# Altium PCB ADC_01_HYB.PcbDoc
Units mm, origin at the board's own origin, x right, y up, seen from the top; angles counter-clockwise.
Board outline 100 x 100 mm, 2 copper layers (Top Layer, Bottom Layer); 74 components, 104 nets, 316 pads, 45 vias.
Unrouted connection lines stored in the file: 1.
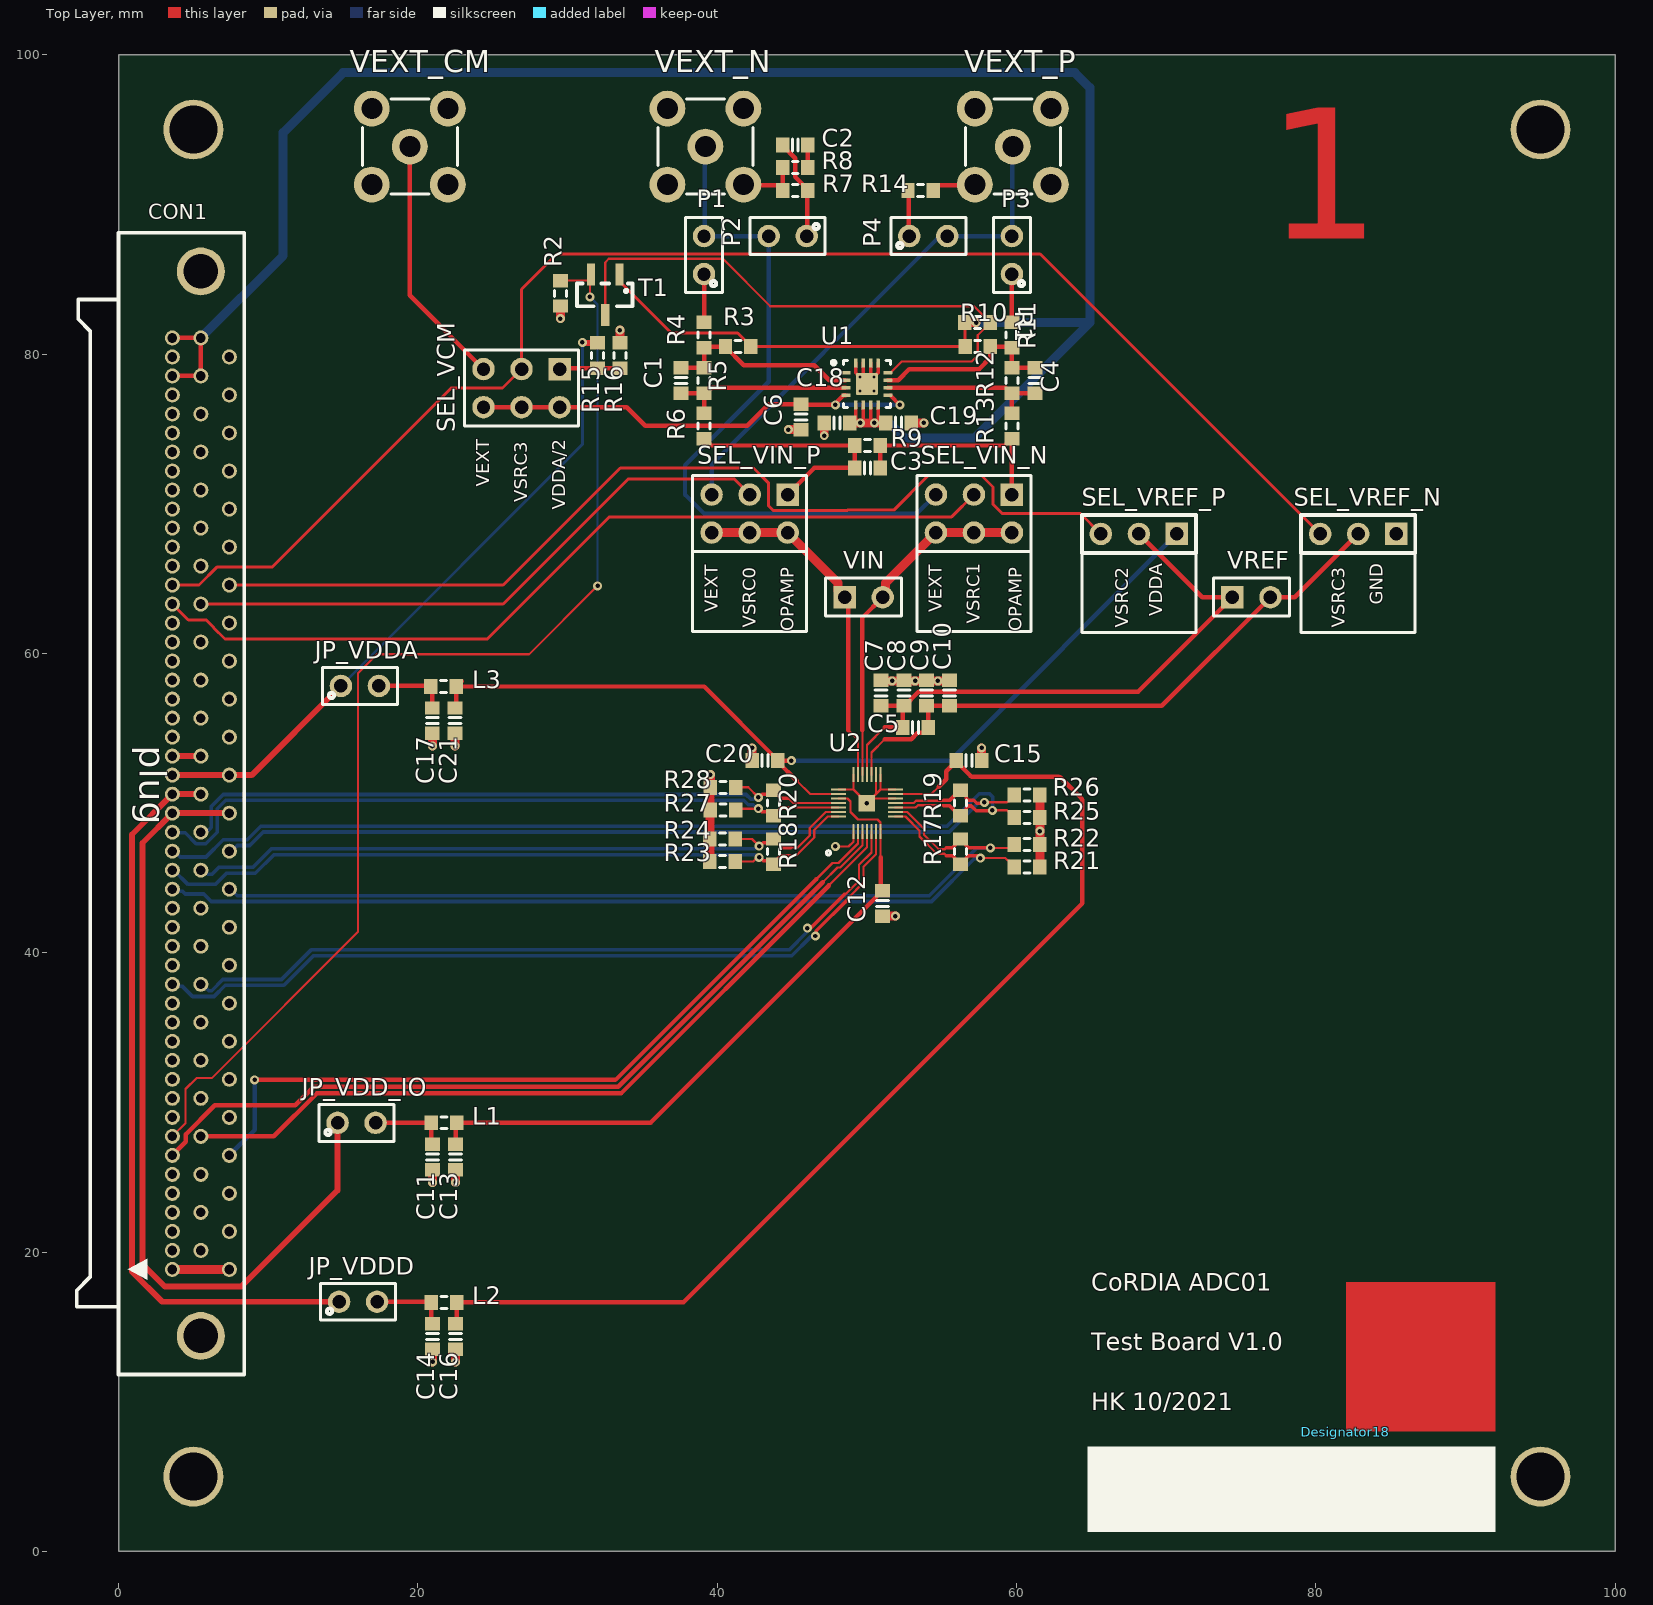
[diagram p0: Top Layer view]
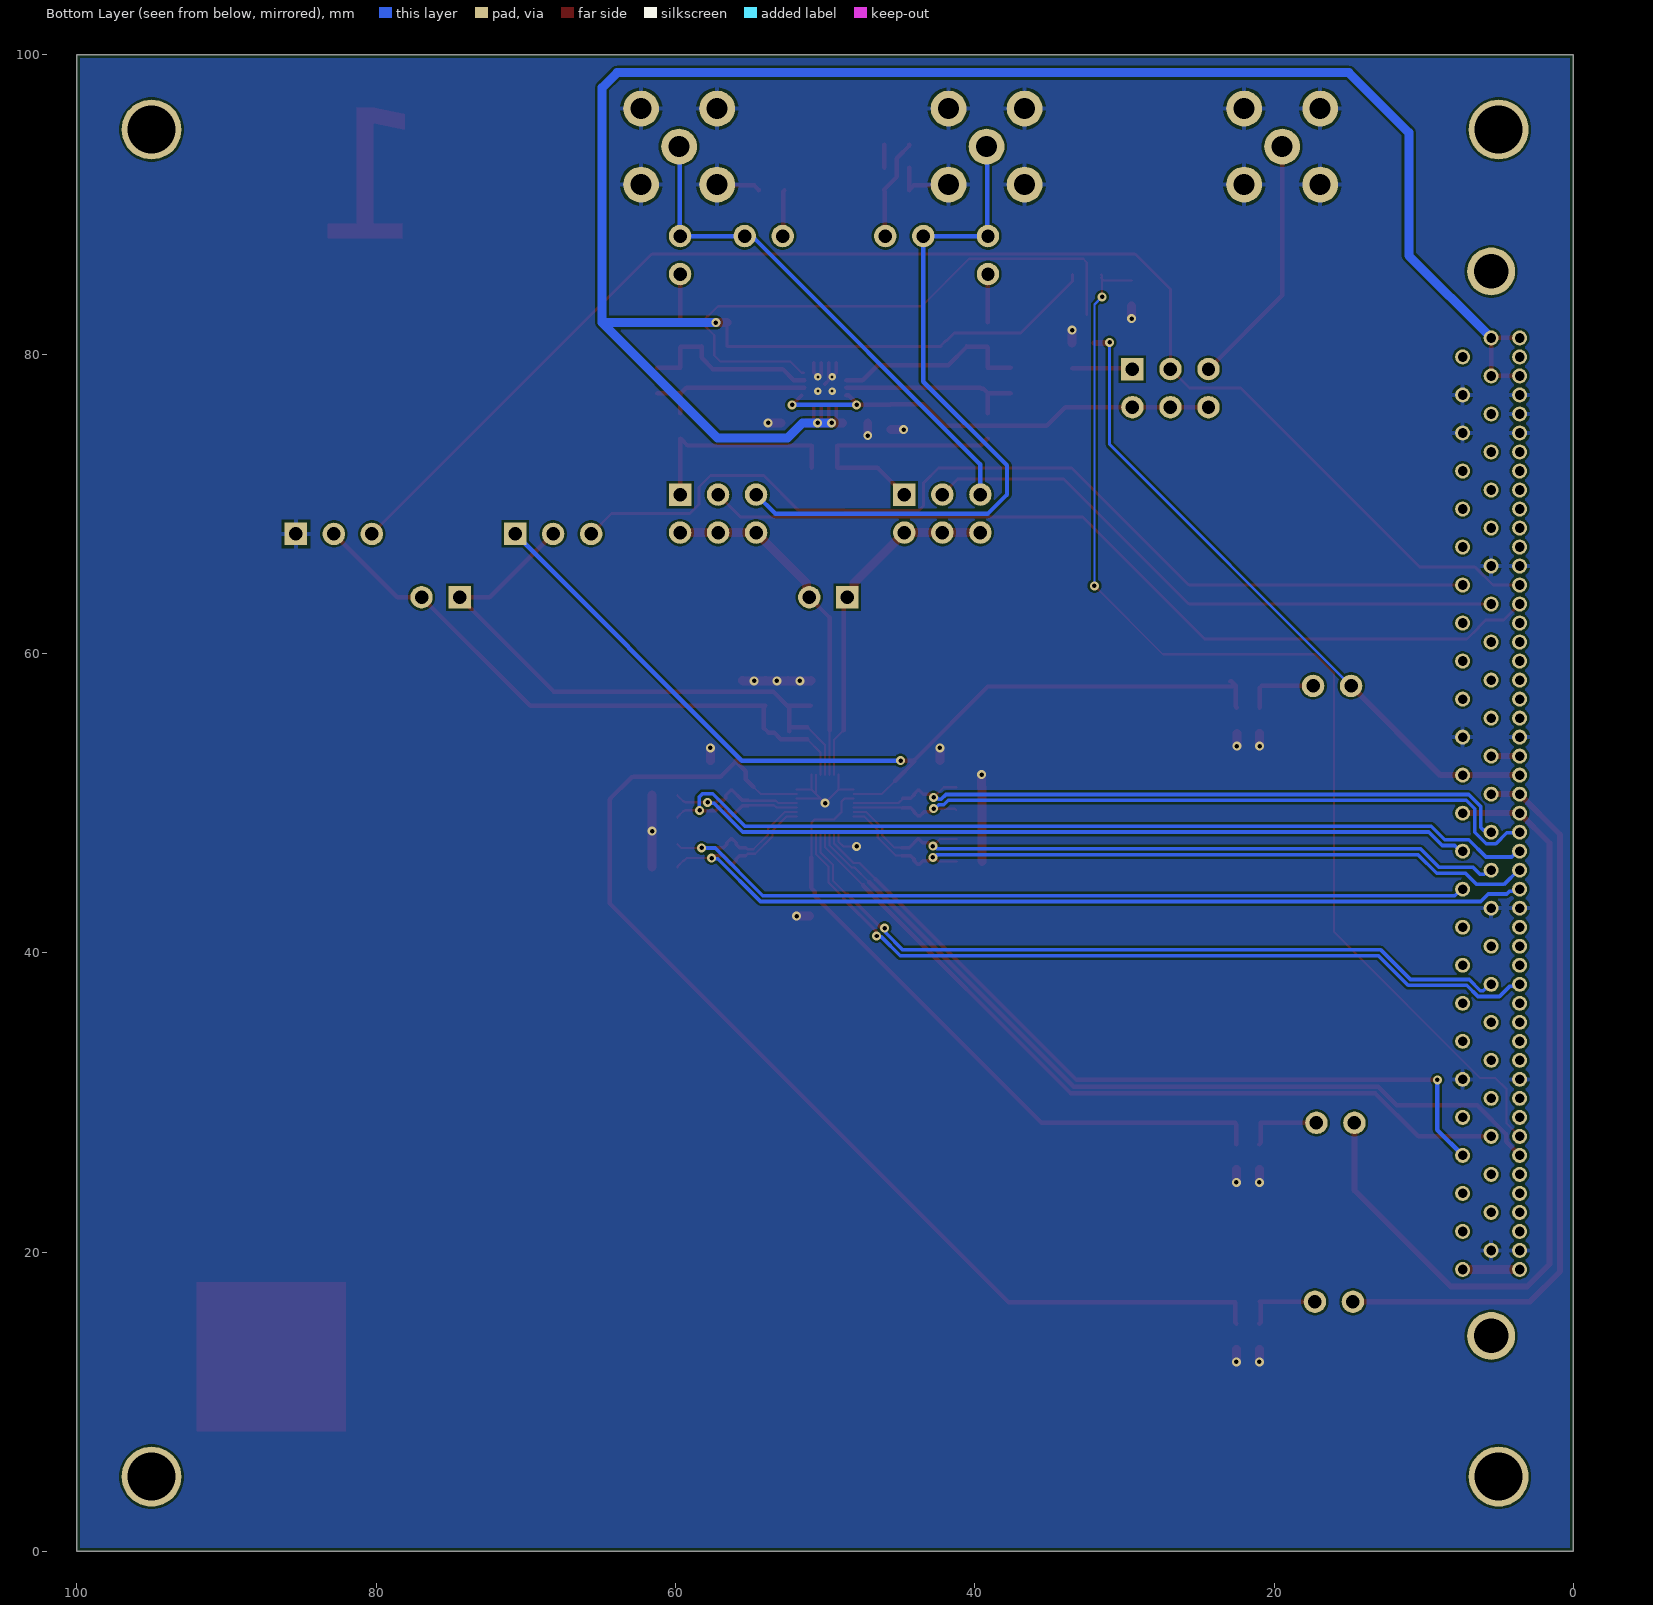
[diagram p1: Bottom Layer view, seen from below]

## Layer stack, top to bottom
Top Solder: solder mask 0.0102, Solder Resist, Dk 3.5
Top Layer: signal copper 0.0356
Dielectric1: dielectric 0.32, FR-4, Dk 4.8
Bottom Layer: signal copper 0.0356
Bottom Solder: solder mask 0.0102, Solder Resist, Dk 3.5

## Board outline
0,0 0,100 100,100 100,0

## Design rules (kind name [scope] priority, off if disabled: settings)
Clearance [All] p1: gap=0.15 ignorepadtopadclearanceinfootprint=FALSE except(0: Arc-Hole Track-Hole SMDPad-Hole THPad-Hole Via-Hole Fill-Hole Poly-Hole Region-Hole Text-Hole)
ComponentClearance [All] p1: gap=0.05 collisioncheckmode=3 verticalgap=0.254 showdistances=FALSE
DiffPairsRouting [All] p1: maxlimit=0.15 minlimit=0.15 mostfreqgap=0.15 toplayer_minwidth=0.15 toplayer_maxwidth=0.24 toplayer_prefwidth=0.24 bottomlayer_minwidth=0.15 bottomlayer_maxwidth=0.24 bottomlayer_prefwidth=0.24 maxuncoupledlength=12.7
HoleSize [All] p1: absolutevalues=TRUE maxlimit=4 minlimit=0.025 maxpercent=80.000 minpercent=20.000
MinimumSolderMaskSliver [All] p1 off: minsoldermaskwidth=0.254
PlaneClearance [All] p1: clearance=0.15
PlaneConnect [All] p1: planeconnectstyle=Direct reliefexpansion=0.508 reliefentries=4 reliefconductorwidth=0.254 reliefairgap=0.254
PolygonConnect PolygonConnect_Via [IsVia] p1: connectstyle=Direct reliefconductorwidth=0.254 reliefentries=4 polygonreliefangle="90 Angle" airgapwidth=0.254
PolygonConnect [All] p2: connectstyle=Relief reliefconductorwidth=0.3 reliefentries=4 polygonreliefangle="90 Angle" airgapwidth=0.2
RoutingVias [All] p1: holewidth=0.711 width=1.27 viastyle="Through Hole" minholewidth=0.3 minwidth=0.6 maxholewidth=0.711 maxwidth=1.27
SilkToBoardRegionClearance [All] p1 off:
SilkToSilkClearance [All] p1 off: silktosilkclearance=0.254
SilkToSolderMaskClearance SilkscreenOverComponentPads [IsPad] p1 off: minsilkscreentomaskgap=0.254 clearancetoexposedcopper=TRUE
SolderMaskExpansion [All] p1: expansion=0.102 istentingtop=FALSE
Width [All] p1: maxlimit=5 minlimit=0.15 preferedwidth=0.2
21 further rules are at their usual default settings.

## Classes and differential pairs
net class LVDS_OUT_P[3..0]: LVDS_OUT_P0 LVDS_OUT_P1 LVDS_OUT_P2 LVDS_OUT_P3
net class LVDS_OUT_N[3..0]: LVDS_OUT_N0 LVDS_OUT_N1 LVDS_OUT_N2 LVDS_OUT_N3
net class LVDS_IN_P[3..0]: LVDS_IN_P0 LVDS_IN_P1 LVDS_IN_P2 LVDS_IN_P3
net class LVDS_IN_N[3..0]: LVDS_IN_N0 LVDS_IN_N1 LVDS_IN_N2 LVDS_IN_N3
component class GPACConnector: CON1
net class AUX_ADC[3..0]: AUX_ADC0 AUX_ADC1 AUX_ADC2 AUX_ADC3
net class DIN[7..0]: DIN0 DIN1 DIN2 DIN3 DIN4 DIN5 DIN6 DIN7
net class DOUT[15..0]: DOUT0 DOUT1 DOUT2 DOUT3 DOUT4 DOUT5 DOUT6 DOUT7 DOUT8 DOUT9 DOUT10 DOUT11 DOUT12 DOUT13 DOUT14 DOUT15
net class FAST_ADC[3..0]: FAST_ADC0 FAST_ADC1 FAST_ADC2 FAST_ADC3
net class FAST_ADC_B[3..0]: FAST_ADC_B0 FAST_ADC_B1 FAST_ADC_B2 FAST_ADC_B3
net class ISRC[11..0]: ISRC0 ISRC1 ISRC2 ISRC3 ISRC4 ISRC5 ISRC6 ISRC7 ISRC8 ISRC9 ISRC10 ISRC11
net class PWR[3..0]: PWR0 PWR1 PWR2 PWR3
net class VSRC[3..0]: VSRC0 VSRC1 VSRC2 VSRC3
differential pair LVDS_OUT3: +LVDS_OUT_P3 -LVDS_OUT_N3
differential pair LVDS_OUT2: +LVDS_OUT_P2 -LVDS_OUT_N2
differential pair LVDS_OUT1: +LVDS_OUT_P1 -LVDS_OUT_N1
differential pair LVDS_OUT0: +LVDS_OUT_P0 -LVDS_OUT_N0
differential pair LVDS_IN3: +LVDS_IN_P3 -LVDS_IN_N3
differential pair LVDS_IN2: +LVDS_IN_P2 -LVDS_IN_N2
differential pair LVDS_IN1: +LVDS_IN_P1 -LVDS_IN_N1
differential pair LVDS_IN0: +LVDS_IN_P0 -LVDS_IN_N0

## Components (designator, comment, footprint, x,y, rotation, side; value= is the part's Value field where it differs from the comment)
C1 "X7R" C0603_imp_N 37.592,78.232 r270 top value=dnm
C2 "X7R" C0603_imp_N 45.212,93.98 r180 top value=220n
C3 "X7R" C0603_imp_N 50.038,72.39 r0 top value=dnm
C4 "X7R" C0603_imp_N 61.214,78.232 r270 top value=dnm
C5 "X7R" C0603_imp_N 53.232,55.064 r0 top value=1u
C6 "X7R" C0603_imp_N 45.6,75.8 r270 top value=220n
C7 "X7R" C0603_imp_N 50.946,57.35 r90 top value=100n
C8 "X7R" C0603_imp_N 52.47,57.35 r90 top value=1u
C9 "X7R" C0603_imp_N 53.994,57.35 r90 top value=100n
C10 "X7R" C0603_imp_N 55.518,57.35 r90 top value=1u
C11 "X7R" C0603_imp_N 20.991,26.358 r270 top value=100n
C12 "X7R" C0603_imp_N 51.054,43.296 r270 top value=100n
C13 "X7R" C0603_imp_N 22.515,26.358 r270 top value=1u
C14 "X7R" C0603_imp_N 20.99,14.36 r270 top value=100n
C15 "X7R" C0603_imp_N 56.808,52.832 r0 top value=100n
C16 "X7R" C0603_imp_N 22.514,14.36 r270 top value=1u
C17 "X7R" C0603_imp_N 20.961,55.503 r270 top value=100n
C18 "X7R" C0603_imp_N 48,75.4 r180 top value=100n
C19 "X7R" C0603_imp_N 52.1,75.4 r0 top value=1u
C20 "X7R" C0603_imp_N 43.18,52.832 r180 top value=100n
C21 "X7R" C0603_imp_N 22.485,55.503 r270 top value=1u
CON1 "-" "KEL 8911-100-178L-F, PLUG" 5.5,14.4 r270 top locked
Designator18 "Comment" "Uni Logo Neu - simple" 82,8 r0 top locked
JP_VDD_IO "-" "CON 1x2 std" 14.633,28.636 r0 top
JP_VDDA "-" "CON 1x2 std" 14.857,57.827 r0 top
JP_VDDD "-" "CON 1x2 std" 14.732,16.684 r0 top
L1 "R" R0603_imp_N 21.753,28.644 r0 top value=Ferrite
L2 "R" R0603_imp_N 21.752,16.646 r0 top value=Ferrite
L3 "R" R0603_imp_N 21.723,57.789 r0 top value=Ferrite
P1 "-" "CON 1x2 std" 39.116,85.344 r90 top
P2 "-" "CON 1x2 std" 45.974,87.884 r180 top
P3 "-" "CON 1x2 std" 59.69,85.344 r90 top
P4 "-" "CON 1x2 std" 52.832,87.884 r0 top
R1 "R" R0603_imp_N 57.4,82.1 r0 top value=20k
R2 "R" R0603_imp_N 29.518,84.06 r270 top value=2k2
R3 "R" R0603_imp_N 41.402,80.518 r180 top value=511R
R4 "R" R0603_imp_N 39.116,81.28 r270 top value=487R
R5 "R" R0603_imp_N 39.116,78.232 r270 top value=499R
R6 "R" R0603_imp_N 39.116,75.184 r90 top value=86R6
R7 "R" R0603_imp_N 45.212,90.932 r180 top value=54R9
R8 "R" R0603_imp_N 45.212,92.456 r180 top value=49R9
R9 "R" R0603_imp_N 50.038,73.89 r180 top value=dnm
R10 "R" R0603_imp_N 57.404,80.518 r0 top value=511R
R11 "R" R0603_imp_N 59.69,81.28 r270 top value=487R
R12 "R" R0603_imp_N 59.69,78.232 r270 top value=499R
R13 "R" R0603_imp_N 59.69,75.184 r90 top value=86R6
R14 "R" R0603_imp_N 53.594,90.932 r0 top value=54R9
R15 "R" R0603_imp_N 32,79.9 r270 top value=1k
R16 "R" R0603_imp_N 33.5,79.9 r90 top value=1k
R17 "R" R0603_imp_N 56.25,46.75 r270 top value=100R
R18 "R" R0603_imp_N 43.75,46.75 r270 top value=100R
R19 "R" R0603_imp_N 56.25,50 r270 top value=100R
R20 "R" R0603_imp_N 43.75,50 r270 top value=100R
R21 "R" R0603_imp_N 60.706,45.72 r0 top value=1k
R22 "R" R0603_imp_N 60.706,47.244 r0 top value=1k
R23 "R" R0603_imp_N 40.35,46.1 r180 top value=1k
R24 "R" R0603_imp_N 40.35,47.6 r180 top value=1k
R25 "R" R0603_imp_N 60.706,49.022 r0 top value=1k
R26 "R" R0603_imp_N 60.706,50.546 r0 top value=1k
R27 "R" R0603_imp_N 40.386,49.53 r180 top value=1k
R28 "R" R0603_imp_N 40.386,51.054 r180 top value=1k
SEL_VCM "Header 3X2" HDR2X3 29.464,78.994 r180 top
SEL_VIN_N "Header 3X2" HDR2X3 59.69,70.612 r180 top
SEL_VIN_P "Header 3X2" HDR2X3 44.704,70.612 r180 top
SEL_VREF_N "-" "HDR 1x3" 82.818,67.984 r180 top
SEL_VREF_P "-" "HDR 1x3" 68.17,67.984 r180 top
T1 "FDN357N" SOT23 32.518,83.96 r180 top value=-
U1 "THS4520RGTT" RGT0016A_V 50,78 r0 top
U2 "ADC prototype 0.1" ADC01 50,50 r0 top
VEXT_CM "-" SMASTEHEND 19.46,93.858 r0 top locked
VEXT_N "-" SMASTEHEND 39.21,93.858 r0 top locked
VEXT_P "-" SMASTEHEND 59.75,93.858 r0 top locked
VIN "Header 2" HDR1X2 48.514,63.754 r0 top
VREF "Header 2" HDR1X2 74.422,63.754 r0 top

## Footprints (in the part's own frame and the unit in brackets; to place one, negate y for a bottom-side part, rotate by r counter-clockwise, add the part's x,y. Pads: shape width x height; smd on the part's side, far side on the other; paste and mask are expansions set on the pad)
ADC01 [mm]
  rect 1.1x1.1 smd paste-2 mask+2: 0(0,0)
  rect 0.15x1 smd: 1(-0.9,-1.9) 2(-0.6,-1.9) 3(-0.3,-1.9) 4(0,-1.9) 5(0.3,-1.9) 6(0.6,-1.9) 7(0.9,-1.9) 15(0.9,1.9) 16(0.6,1.9) 17(0.3,1.9) 18(0,1.9) 19(-0.3,1.9) 20(-0.6,1.9) 21(-0.9,1.9)
  rect 1x0.15 smd: 8(1.9,-0.9) 9(1.9,-0.6) 10(1.9,-0.3) 11(1.9,0) 12(1.9,0.3) 13(1.9,0.6) 14(1.9,0.9) 22(-1.9,0.9) 23(-1.9,0.6) 24(-1.9,0.3) 25(-1.9,0) 26(-1.9,-0.3) 27(-1.9,-0.6) 28(-1.9,-0.9)
C0603_imp_N [mm] "Chip Capacitor, Body 1.6x0.8mm, IPC Medium Density"
  rect 0.9x1 smd: 1(-0.85,0) 2(0.85,0)
  silkscreen extent -0.2,-0.4 0.2,0.4, body extent -0.87,-0.48 0.87,0.48, height 0.85
"CON 1x2 std" [mm]
  round 1.5 hole 0.9: 1(0,0) 2(2.54,0)
  silkscreen extent -1.23,-1.23 3.77,1.23
HDR1X2 [mm] "Connector; Header; 2 Position"
  rect 1.5x1.5 hole 0.9: 1(0,0)
  round 1.5 hole 0.9: 2(2.54,0)
  silkscreen extent -1.27,-1.27 3.81,1.27
HDR2X3 [mm] "Connector; Header; 3x2 Position"
  rect 1.5x1.5 hole 0.9: 1(0,0)
  round 1.5 hole 0.9: 2(0,2.54) 3(2.54,0) 4(2.54,2.54) 5(5.08,0) 6(5.08,2.54)
  silkscreen extent -1.27,-1.27 6.35,3.81
"HDR 1x3" [mm] "Steckjumper 3 pins"
  rect 1.5x1.5 hole 0.9: 1(-2.54,0)
  round 1.5 hole 0.9: 2(0,0) 3(2.54,0)
  silkscreen extent -3.81,-1.27 3.81,1.27
"KEL 8911-100-178L-F, PLUG" [mm] "100 pin plug,  board to board, right angle"
  round 1 hole 0.65: 1(-4.445,1.905) 2(-4.445,-1.905) 3(-5.715,0) 4(-5.715,-1.905) 5(-6.985,1.905) 6(-6.985,-1.905) 7(-8.255,0) 8(-8.255,-1.905) 9(-9.525,1.905) 10(-9.525,-1.905) 11(-10.795,0) 12(-10.795,-1.905) 13(-12.065,1.905) 14(-12.065,-1.905) 15(-13.335,0) 16(-13.335,-1.905) 17(-14.605,1.905) 18(-14.605,-1.905) 19(-15.875,0) 20(-15.875,-1.905) 21(-17.145,1.905) 22(-17.145,-1.905) 23(-18.415,0) 24(-18.415,-1.905) 25(-19.685,1.905) 26(-19.685,-1.905) 27(-20.955,0) 28(-20.955,-1.905) 29(-22.225,1.905) 30(-22.225,-1.905) 31(-23.495,0) 32(-23.495,-1.905) 33(-24.765,1.905) 34(-24.765,-1.905) 35(-26.035,0) 36(-26.035,-1.905) 37(-27.305,1.905) 38(-27.305,-1.905) 39(-28.575,0) 40(-28.575,-1.905) 41(-29.845,1.905) 42(-29.845,-1.905) 43(-31.115,0) 44(-31.115,-1.905) 45(-32.385,1.905) 46(-32.385,-1.905) 47(-33.655,0) 48(-33.655,-1.905) 49(-34.925,1.905) 50(-34.925,-1.905) 51(-36.195,0) 52(-36.195,-1.905) 53(-37.465,1.905) 54(-37.465,-1.905) 55(-38.735,0) 56(-38.735,-1.905) 57(-40.005,1.905) 58(-40.005,-1.905) 59(-41.275,0) 60(-41.275,-1.905) 61(-42.545,1.905) 62(-42.545,-1.905) 63(-43.815,0) 64(-43.815,-1.905) 65(-45.085,1.905) 66(-45.085,-1.905) 67(-46.355,0) 68(-46.355,-1.905) 69(-47.625,1.905) 70(-47.625,-1.905) 71(-48.895,0) 72(-48.895,-1.905) 73(-50.165,1.905) 74(-50.165,-1.905) 75(-51.435,0) 76(-51.435,-1.905) 77(-52.705,1.905) 78(-52.705,-1.905) 79(-53.975,0) 80(-53.975,-1.905) 81(-55.245,1.905) 82(-55.245,-1.905) 83(-56.515,0) 84(-56.515,-1.905) 85(-57.785,1.905) 86(-57.785,-1.905) 87(-59.055,0) 88(-59.055,-1.905) 89(-60.325,1.905) 90(-60.325,-1.905) 91(-61.595,0) 92(-61.595,-1.905) 93(-62.865,1.905) 94(-62.865,-1.905) 95(-64.135,0) 96(-64.135,-1.905) 97(-65.405,1.905) 98(-65.405,-1.905) 99(-66.675,0) 100(-66.675,-1.905)
  round 3.2 hole 2.3: L1(0,0) L2(-71.12,0)
  silkscreen extent -73.7,-8.29 2.58,2.9
R0603_imp_N [mm] "Chip Resistor, Body 1.6x0.8mm, IPC Medium Density"
  rect 0.9x1 smd: 1(-0.85,0) 2(0.85,0)
  silkscreen extent -0.2,-0.4 0.2,0.4, body extent -0.85,-0.48 0.85,0.48, height 0.6
RGT0016A_V [mm] "QFN, 16-Leads, Body 3x3mm, Pitch 0.5mm, Thermal Pad 1.45x1.45mm"
  rrect42% 0.6x0.24 smd: 1(-1.4,0.75) 2(-1.4,0.25) 3(-1.4,-0.25) 4(-1.4,-0.75) 9(1.4,-0.75) 10(1.4,-0.25) 11(1.4,0.25) 12(1.4,0.75)
  rrect42% 0.24x0.6 smd: 5(-0.75,-1.4) 6(-0.25,-1.4) 7(0.25,-1.4) 8(0.75,-1.4) 13(0.75,1.4) 14(0.25,1.4) 15(-0.25,1.4) 16(-0.75,1.4)
  rrect7% 1.45x1.45 smd paste-0.725: 17(0,0)
  silkscreen extent -2.35,-1.57 1.57,1.58, body extent -1.5,-1.5 1.5,1.5, height 1
SMASTEHEND [mm]
  round 2.4 hole 1.4: 1(0,0) 2(-2.54,-2.54) 3(2.54,-2.54) 4(2.54,2.54) 5(-2.54,2.54)
  silkscreen extent -3.17,-3.17 3.17,3.17
SOT23 [mm] "SOT23"
  rect 0.55x1.45 smd: 1(-0.95,-1.35) 2(0.95,-1.35) 3(0,1.35)
  silkscreen extent -1.83,-0.76 1.88,0.76
"Uni Logo Neu - simple" [mm]
  Top Layer region: 0,0 10,0 10,10 0,10

## Part data
C1 C2 C3 C4 C5 C6 C7 C8 C9 C10 C11 C12 C13 C14 C15 C16 C17 C18 C19 C20 C21: library part C, "Capacitor", Class=Passive, Comment_1=-, Constraints=6.3V, HelpURL=-, LatestRevisionDate=27-Nov-2007, PackageDescription=-, Publisher="Silab J.S.", Type_1="SMD Chip Capacitor"
CON1: library part "CON KEL 8911, male", "KEL 8911 100 pin board to board connector", Class=Connector, Comment_1=KEL, Constraints=-, HelpURL=http://www.kel.jp/english/product/Half_8900/8900.pdf, LatestRevisionDate=24-Sep-2008, PackageDescription=-, Publisher="Silab J.S.", Revision="July-2002: Re-released for DXP Platform.", Type_1=8911-100-178L-F
JP_VDD_IO JP_VDDA JP_VDDD P1 P2 P3 P4: library part "JUMPER 1X2S", "Jumper, Solderbridge 1x2", Class=Connector, Comment_1=-, Constraints=-, HelpURL=-, LatestRevisionDate=24-Sep-2008, PackageDescription=-, Publisher="Silab C.H.", Type_1=-
L1 L2 L3 R1 R2 R3 R4 R5 R6 R7 R8 R9 R10 R11 R12 R13 R14 R15 R16 R17 R18 R19 R20 R21 R22 R23 R24 R25 R26 R27 R28: "SMD Chip Resistor", Class=Passive, Comment_1=-, Constraints=1%, HelpURL=-, LatestRevisionDate=27-Nov-2007, PackageDescription=-, Publisher="Silab J.S.", Type_1="SMD Chip Resistor"
SEL_VCM SEL_VIN_N SEL_VIN_P: "Header, 3-Pin, Dual row", LatestRevisionDate=17-Jul-2002, LatestRevisionNote="Re-released for DXP Platform.", Publisher="Altium Limited"
SEL_VREF_N SEL_VREF_P: library part "JUMPER 1X3S", "Jumper, Solderbridge 1x3", Class=Connector, Comment_1=-, Constraints=-, HelpURL=-, LatestRevisionDate=24-Sep-2008, PackageDescription=-, Publisher="Silab C.H.", Type_1=-
T1: library part "T NMOS", "NMOS Transistor SMD", Class="Discrete Silicon", Comment_1=-, Constraints=-, HelpURL=-, LatestRevisionDate=02-Oct-2008, PackageDescription=-, Publisher="Silab J.S.", Type_1=FDN357N
U1: library part CMP-0811-00255-2, "Rail-to-Rail Output Wideband Fully Differential Amplifier, 3 to 5.25 V, -40 to 85 degC, 16-pin QFN (RGT16), Green (RoHS & no Sb/Br)", Manufacturer="Texas Instruments", Offset Voltage Drift (+/-)(Max)(uV/Degrees Celsius=1, 2nd Harmonic(dBc)=115, 3rd Harmonic(dBc)=123, @ MHz=0.1, BW @ Acl(MHz)=620, Code_JEDEC=MO-220, ComponentLink1Description="Manufacturer URL", ComponentLink1URL=http://www.ti.com/, ComponentLink2Description=Datasheet, ComponentLink2URL=http://www.ti.com/general/docs/lit/getliterature.tsp?genericPartNumber=THS4520&fileType=pdf, ComponentLink3Description="Package Specification", ComponentLink3URL=http://www.ti.com/litv/pdf/mpqf119g, DatasheetVersion=SLOS503B, Eco-Plan="Green (RoHS & no Sb/Br)", Io(Typ)(mA)=105, Iq per channel(Max)(mA)=15.3, Mounting Technology="Surface Mount", Number of Channels=1, PackageDescription="16-Pin Plastic Flat Pack, Body 3 x 3 mm, Pitch 0.5 mm", PackageReference=RGT0016A, PackageVersion="4203495/H, 10/2011", PartNumber=THS4520RGTT, Rail-Rail=Out, Settling Time (0.1%)(Typ)(ns)=7, Slew Rate(Typ)(V/us)=570, SubFamily="Fully Differential Amplifier", Vio(Max)(mV)=2.5, Vn at Flatband(Typ)(nV/rtHz)=2, Vs(Max)(V)=5.25, Vs(Min)(V)=3
U2: library part ADC01
VEXT_CM VEXT_N VEXT_P: library part SMA, "MCX RF Coaxial PCB Connector, Thru-Hole, Vertical Mount Socket, Blunt Post Terminal, 50 Ohm Impedance", Class=Connector, Comment_1=-, Constraints=-, HelpURL=http://www.amphenolrf.com/pdf/21.pdf, LatestRevisionDate=24-Sep-2008, PackageDescription=-, Publisher="Silab C.H.", Type_1=-
VIN VREF: "Header, 2-Pin", LatestRevisionDate=17-Jul-2002, LatestRevisionNote="Re-released for DXP Platform.", Publisher="Altium Limited"

## Free pads (board coordinates)
  round 4 hole 3.2: L1(5,5) L2(95,5) L3(95,95) L4(5,95)

## Via types
v1: diameter 0.6, hole 0.3, Top Layer to Bottom Layer, tented both sides, 41 vias
v2: diameter 0.5, hole 0.2, Top Layer to Bottom Layer, 4 vias

## Nets (pads, with @x,y where several pads share a name; then routed paths per layer and width w, separated by ;. In a path a pad name is that pad's centre, name@x,y a point inside that pad or via, vN(x,y) a via of type N, cw(c..) or ccw(c..) an arc to the next point about the centre after c; other vN are vias at no path point)
AUX_ADC0: CON1.77
AUX_ADC1: CON1.78
AUX_ADC2: CON1.79
AUX_ADC3: CON1.80
DIN0: CON1.5
DIN1: CON1.6
DIN2: CON1.7
DIN3: CON1.8
DIN4: CON1.9
DIN5: CON1.10
DIN6: CON1.11
DIN7: CON1.12
DOUT0: CON1.13 U2.2 | length 53.4
  Top Layer w0.15: 46.6,44.9 47.7,46 48.1,46 49.4,47.3 U2.2
  Top Layer w0.3: v1(9.1,31.5) 33.2,31.5 46.6,44.9
  Bottom Layer w0.3: CON1.13 9.1,28.16 v1(9.1,31.5)
DOUT1: CON1.14 U2.3 | length 55.9
  Top Layer w0.15: 47.05,44.714 48.036,45.7 48.224,45.7 49.7,47.176 U2.3
  Top Layer w0.3: CON1.14 4.496,27.366 4.496,27.863 6.439,29.805 11.805,29.805 13.05,31.05 33.386,31.05 47.05,44.714
DOUT2: CON1.15 U2.4 | length 53.6
  Top Layer w0.15: 47.449,44.5 48.349,45.4 50,47.051 U2.4
  Top Layer w0.3: CON1.15 10.371,27.735 13.236,30.6 33.573,30.6 47.449,44.476 47.449,44.5
DOUT3: CON1.16 R2.1 T1.2 | length 78.3
  Top Layer w0.15: CON1.16 4.475,28.615 4.475,30.891 5.209,31.625 6.225,31.625 16.002,41.402 16.002,58.674 17.272,59.944 27.432,59.944 v1(32.004,64.516) ; R2.1 31.368,84.91 T1.2@31.496,85.038 ; v1(31.496,83.82) T1.2@31.496,85.038 ; T1.2@31.568,85.11 T1.2@31.496,85.038 ; T1.2 31.496,85.238 T1.2@31.496,85.038
  Bottom Layer w0.15: v1(31.496,83.82) 32.004,83.312 v1(32.004,64.516)
DOUT4: CON1.17
DOUT5: CON1.18
DOUT6: CON1.19
DOUT7: CON1.20
DOUT8: CON1.23
DOUT9: CON1.24
DOUT10: CON1.25
DOUT11: CON1.26
DOUT12: CON1.27
DOUT13: CON1.28
DOUT14: CON1.29
DOUT15: CON1.30
EN_OPA: R1.2 T1.3 U1.12 | length 40.2
  Top Layer w0.15: T1.3 32.518,86.118 32.76,86.36 40.386,86.36 43.546,83.2 57.15,83.2 57.825,82.525 57.875,82.525 58.25,82.15 R1.2 57.4,81.25 57.4,79.9 57,79.5 52.33,79.5 51.58,78.75 U1.12
FAST_ADC0: CON1.82
FAST_ADC1: CON1.84
FAST_ADC2: CON1.86
FAST_ADC3: CON1.88
FAST_ADC_B0: CON1.81
FAST_ADC_B1: CON1.83
FAST_ADC_B2: CON1.85
FAST_ADC_B3: CON1.87
GND: C6.2 C7.2 C8.2 C9.2 C10.2 C11.2 C12.2 C13.2 C14.2 C15.2 C16.2 C17.2 C18.2 C19.2 C20.2 C21.2 CON1.3 CON1.4 CON1.21 CON1.22 CON1.39 CON1.40 CON1.57 CON1.58 CON1.75 CON1.76 CON1.89 CON1.90 CON1.92 CON1.93 CON1.94 R2.2 R7.2 R8.2 R14.2 R16.2 R21.2 R22.2 R23.2 R24.2 R25.2 R26.2 R27.2 R28.2 SEL_VREF_N.1 U1.13 U1.14 U1.15 U1.16 U1.17 U2.0 U2.1 U2.12 U2.14 U2.15 U2.16 U2.21 U2.22 VEXT_CM.2 VEXT_CM.3 VEXT_CM.4 VEXT_CM.5 VEXT_N.2 VEXT_N.3 VEXT_N.4 VEXT_N.5 VEXT_P.2 VEXT_P.3 VEXT_P.4 VEXT_P.5 | length 50.5
  Top Layer w0.15: v1(47.9,47.1) 48.776,47.1 49.1,47.424 U2.1 ; U2.22 49.1,50.9 ; U2.21 49.1,50.9 ; U2.16 50.6,50.6 ; U2.15 50.9,50.9 ; U2.12 U2.0@50.3,50.3 ; U2.14 50.9,50.9 ; 49.1,50.9 v1(50,50) U2.0@50.3,50.3 ; U2.0@50.3,50.3 50.6,50.6 ; 50.6,50.6 50.9,50.9
  Top Layer w0.25: U1.16 49.25,78.75 49.4,78.6 v2(49.525,78.475) ; U1.15 49.75,78.25 U1.17 ; U1.14 50.25,78.6 50.375,78.475 v2(50.475,78.475) 50.75,78.75 U1.13
  Top Layer w0.3: VEXT_N.3 41.786,91.282 44.062,91.282 R7.2@44.362,90.982 ; R7.2 R7.2@44.362,90.982 ; R8.2 R7.2@44.362,90.982 ; R14.2 54.444,90.982 54.744,91.282 57.174,91.282 VEXT_P.2
  Top Layer w0.6: v1(20.961,53.803) C17.2 ; v1(20.99,12.66) C14.2 ; v1(20.991,24.658) C11.2 ; v1(22.485,53.803) C21.2 ; v1(22.514,12.66) C16.2 ; v1(22.515,24.658) C13.2 ; v1(29.518,82.36) R2.2 ; R16.2 v1(33.5,81.6) ; R23.2 39.518,46.118 39.518,51.036 R28.2 v1(39.536,51.904) ; C20.2 v1(42.33,53.682) ; v1(44.75,74.95) C6.2 ; v1(47.15,74.55) C18.2 ; C7.2 50.98,58.166 v1(51.689,58.166) 52.436,58.166 C8.2 52.504,58.166 v1(53.213,58.166) 53.96,58.166 C9.2 54.028,58.166 55.484,58.166 C10.2 ; C12.2 v1(51.904,42.446) ; C19.2 v1(53.8,75.4) ; C15.2 v1(57.658,53.682) ; R21.2 R22.2 v1(61.55,48.125) R25.2 R26.2
  other v1: 54.737,58.166
  other v2: 49.525,77.525 50.475,77.525
INJ: CON1.91
ISRC0: CON1.59
ISRC1: CON1.60
ISRC2: CON1.61
ISRC3: CON1.62
ISRC4: CON1.63
ISRC5: CON1.64
ISRC6: CON1.65
ISRC7: CON1.66
ISRC8: CON1.67
ISRC9: CON1.68
ISRC10: CON1.69
ISRC11: CON1.70
LVDS_IN_N0: CON1.32 U2.6 | length 53.6
  Top Layer w0.15: 48.748,43.598 48.748,43.661 49.775,44.689 49.775,45.751 50.6,46.576 U2.6
  Top Layer w0.24: v1(46.555,41.12) 46.624,41.189 46.624,41.474 48.748,43.598
  Bottom Layer w0.24: CON1.32 3.74,37.75 4.278,37.75 4.946,37.081 6.381,37.081 7.125,37.825 11.05,37.825 13.025,39.8 44.981,39.8 46.232,41.051 46.486,41.051 v1(46.555,41.12)
LVDS_IN_N1: CON1.34
LVDS_IN_N2: CON1.36
LVDS_IN_N3: CON1.38
LVDS_IN_P0: CON1.31 U2.5 | length 51
  Top Layer w0.15: 48.503,43.905 48.567,43.905 49.475,44.813 49.475,45.875 50.3,46.7 U2.5
  Top Layer w0.24: v1(46.025,41.65) 46.094,41.719 46.317,41.719 48.503,43.905
  Bottom Layer w0.24: CON1.31 5.597,37.895 6.021,37.471 6.219,37.471 6.963,38.215 10.888,38.215 12.863,40.19 44.82,40.19 45.956,41.327 45.956,41.581 v1(46.025,41.65)
LVDS_IN_P1: CON1.33
LVDS_IN_P2: CON1.35
LVDS_IN_P3: CON1.37
LVDS_OUT_N0: CON1.42 R17.2 R21.1 U2.8 | length 65.7
  Top Layer w0.15: U2.8 52.576,49.1 53.516,48.16 53.516,47.76 54.668,46.608 55.177,46.608 55.3,46.484 ; v1(57.578,46.328) 59.248,46.328 59.431,46.145 59.481,46.145 59.856,45.77 R21.1
  Top Layer w0.24: 55.3,46.484 55.717,46.484 55.94,46.261 55.94,46.16 56.2,45.9 56.3,45.9 56.56,46.16 56.56,46.261 56.783,46.484 57.363,46.484 57.519,46.328 v1(57.578,46.328)
  Bottom Layer w0.24: CON1.42 3.74,44.1 4.278,44.1 4.452,43.925 5.692,43.925 6.192,43.425 54.321,43.425 57.174,46.279 57.529,46.279 v1(57.578,46.328)
LVDS_OUT_N1: CON1.44 R18.2 R23.1 U2.28 | length 49.4
  Top Layer w0.15: R23.1 42.403,46.1 42.678,46.375 v1(42.8,46.375) ; 44.875,46.491 44.887,46.503 45.277,46.503 46.481,47.706 46.481,48.206 47.375,49.1 U2.28
  Top Layer w0.24: v1(42.8,46.375) 42.859,46.375 43.075,46.16 43.44,46.16 43.7,45.9 43.8,45.9 44.06,46.16 44.06,46.261 44.29,46.491 44.875,46.491
  Bottom Layer w0.24: CON1.44 3.697,45.515 4.647,44.565 6.463,44.565 7.208,45.31 9.137,45.31 10.382,46.555 42.523,46.555 42.703,46.375 v1(42.8,46.375)
LVDS_OUT_N2: CON1.46 R19.2 R25.1 U2.10 | length 66.7
  Top Layer w0.15: U2.10 52.325,49.7 53.25,49.7 53.405,49.855 55.105,49.855 55.15,49.81 ; v1(58.38,49.52) 59.358,49.52 59.431,49.447 59.481,49.447 59.856,49.072 R25.1
  Top Layer w0.24: 55.15,49.81 55.54,49.81 56.2,49.15 R19.2 56.3,49.15 56.63,49.48 56.63,49.664 56.771,49.805 56.969,49.805 57.294,49.48 58.341,49.48 v1(58.38,49.52)
  Bottom Layer w0.24: CON1.46 3.731,46.785 4.116,46.4 5.85,46.4 7.005,47.555 8.605,47.555 9.505,48.455 55.349,48.455 57.514,50.62 58.191,50.62 58.42,50.391 58.42,49.686 v1@58.331,49.597
LVDS_OUT_N3: CON1.48 R20.2 R27.1 U2.26 | length 49.2
  Top Layer w0.15: R27.1 41.331,49.625 v1(42.75,49.625) ; 44.8,49.682 44.841,49.641 44.878,49.641 44.937,49.7 47.507,49.7 U2.26
  Top Layer w0.24: v1(42.75,49.625) 42.809,49.625 43.025,49.409 43.39,49.409 43.65,49.15 R20.2 ; R20.2@43.8,49.15 44.06,49.409 44.06,49.459 44.283,49.682 44.8,49.682
  Bottom Layer w0.24: CON1.48 3.639,48.011 4.455,48.011 5.181,47.285 5.819,47.285 6.59,48.056 6.59,49.613 7.162,50.185 41.763,50.185 42.069,49.879 42.398,49.879 42.653,49.625 v1(42.75,49.625)
LVDS_OUT_P0: CON1.41 R17.1 R22.1 U2.9 | length 62.3
  Top Layer w0.15: U2.9 52.493,49.4 52.7,49.4 53.816,48.284 53.816,47.884 54.792,46.908 55.192,46.908 55.3,47.015 ; v1(58.25,47) 59.612,47 R22.1
  Top Layer w0.24: 55.3,47.015 55.717,47.015 55.94,47.239 55.94,47.34 56.2,47.6 56.3,47.6 56.56,47.34 56.56,47.239 56.783,47.015 58.235,47.015 v1(58.25,47)
  Bottom Layer w0.24: CON1.41 7.496,44.245 7.926,43.815 54.159,43.815 57.344,47 v1(58.25,47)
LVDS_OUT_P1: CON1.43 R18.1 R24.1 U2.27 | length 47
  Top Layer w0.15: R24.1 42.325,47.6 v1(42.8,47.125) ; 44.9,47.025 45.375,47.025 46.181,47.831 46.181,48.33 47.251,49.4 47.507,49.4 U2.27
  Top Layer w0.24: v1(42.8,47.125) 42.859,47.125 43.075,47.34 43.49,47.34 R18.1 43.8,47.6 44.375,47.025 44.9,47.025
  Bottom Layer w0.24: CON1.43 5.706,45.515 5.972,45.249 6.249,45.249 6.7,45.7 7.067,45.7 8.975,45.7 10.22,46.945 42.523,46.945 42.703,47.125 v1(42.8,47.125)
LVDS_OUT_P2: CON1.45 R19.1 R26.1 U2.11 | length 60.8
  Top Layer w0.15: U2.11 53.126,50 53.281,50.155 55.08,50.155 55.1,50.175 ; v1(57.85,50.05) 59.36,50.05 59.431,50.121 59.481,50.121 59.856,50.496 R26.1
  Top Layer w0.24: 55.15,50.2 55.55,50.2 56.2,50.85 R19.1 56.3,50.85 56.63,50.52 56.63,50.336 56.771,50.195 57.131,50.195 57.336,49.99 57.79,49.99 v1(57.85,50.05)
  Bottom Layer w0.24: CON1.45 7.546,46.785 7.926,47.165 8.767,47.165 9.667,48.065 55.511,48.065 57.446,50 57.8,50 v1(57.85,50.05)
LVDS_OUT_P3: CON1.47 R20.1 R28.1 U2.25 | length 47
  Top Layer w0.15: R28.1 42.071,51.054 v1(42.75,50.375) ; 44.8,50.317 44.8,50.291 45.091,50 U2.25
  Top Layer w0.24: v1(42.75,50.375) 42.809,50.375 43.025,50.59 43.44,50.59 43.7,50.85 R20.1 43.8,50.85 44.06,50.59 44.06,50.541 44.283,50.317 44.8,50.317
  Bottom Layer w0.24: CON1.47 5.645,48.2 6.028,48.2 6.2,48.372 6.2,49.775 7,50.575 41.925,50.575 42.231,50.269 42.429,50.269 42.466,50.306 42.681,50.306 v1(42.75,50.375)
NetC1_1: C1.1 R3.2 R4.2 R5.1 U1.2 | length 13.4
  Top Layer w0.3: C1.1 R5.1 R4.2 39.16,80.474 40.508,80.474 R3.2 40.552,80.468 41.772,79.248 46.482,79.248 47.48,78.25 U1.2
NetC1_2: C1.2 R5.2 R6.2 U1.3 | length 12.5
  Top Layer w0.3: C1.2 R5.2 ; R6.2 R5.2 ; U1.3 39.642,77.75 39.574,77.682 39.416,77.682 R5.2
NetC2_1: C2.1 R8.1 | length 1.5
  Top Layer w0.3: R8.1 C2.1
NetC2_2: C2.2 P2.1 R7.1 | length 6.8
  Top Layer w0.3: C2.2 44.362,93.93 45.212,93.08 45.212,91.832 46.062,90.982 R7.1 46.018,90.888 46.018,87.928 P2.1
NetC4_1: C4.1 R10.2 R11.2 R12.1 U1.11 | length 12.6
  Top Layer w0.3: U1.11 52.088,78.25 52.838,79 57.5,79 58.244,79.744 58.244,80.508 R10.2 58.298,80.474 59.646,80.474 R11.2 R12.1 C4.1
NetC4_2: C4.2 R12.2 R13.2 U1.10 | length 11.3
  Top Layer w0.3: U1.10 59.272,77.75 59.64,77.382 R12.2 ; R13.2 R12.2 ; C4.2 R12.2
NetC6_1: C6.1 SEL_VCM.2 SEL_VCM.4 SEL_VCM.6 U1.4 U1.9 | length 30.9
  Top Layer w0.25: U1.9@51.575,77.245 51.575,77.225 v1(52.2,76.6)
  Top Layer w0.3: SEL_VCM.6 SEL_VCM.4 SEL_VCM.2 33.946,76.454 35.2,75.2 42,75.2 43.45,76.65 C6.1 45.65,76.6 v1(47.9,76.6) ; v1@47.83,76.65 48.43,77.25 U1.4
  Bottom Layer w0.3: v1(47.9,76.6) v1(52.2,76.6)
NetC11_1: C11.1 JP_VDD_IO.2 L1.1 | length 5.2
  Top Layer w0.3: JP_VDD_IO.2 20.895,28.636 L1.1 20.903,27.296 C11.1
NetC14_1: C14.1 JP_VDDD.2 L2.1 | length 5.2
  Top Layer w0.3: JP_VDDD.2 L2.1@20.964,16.684 ; L2.1@20.864,16.684 L2.1 20.902,15.298 C14.1
NetC17_1: C17.1 JP_VDDA.2 L3.1 | length 5
  Top Layer w0.3: JP_VDDA.2 20.835,57.827 L3.1 20.961,57.701 C17.1
NetP1_1: P1.1 R4.1 | length 3.2
  Top Layer w0.3: R4.1 P1.1
NetP3_1: P3.1 R11.1 | length 3.2
  Top Layer w0.3: R11.1 P3.1
NetP4_1: P4.1 R14.1 | length 3.1
  Top Layer w0.3: R14.1 52.788,90.888 52.788,87.928 P4.1
NetR15_2: R15.2 R16.1 SEL_VCM.1 | length 4.1
  Top Layer w0.25: SEL_VCM.1 SEL_VCM.1@29.52,79.05
  Top Layer w0.3: SEL_VCM.1@29.52,79.05 R16.1
NetSEL_VCM_5: SEL_VCM.5 VEXT_CM.1 | length 16.9
  Top Layer w0.3: VEXT_CM.1 19.46,83.918 SEL_VCM.5
OPA_OUT_N: C3.2 R9.1 R13.1 SEL_VIN_N.1 | length 14.2
  Top Layer w0.3: C3.2 R9.1 59.196,73.89 59.64,74.334 R13.1 SEL_VIN_N.1
OPA_OUT_P: C3.1 R6.1 R9.2 SEL_VIN_P.1 | length 17
  Top Layer w0.3: R6.1 39.166,74.334 39.61,73.89 R9.2 C3.1 46.482,72.39 SEL_VIN_P.1
PWR0: CON1.49 CON1.50 JP_VDD_IO.1 | length 55.6
  Top Layer w0.4: CON1.49 CON1.50 1.6,47.33 1.6,19.2 3.1,17.7 8.2,17.7 14.633,24.133 JP_VDD_IO.1
PWR1: CON1.51 CON1.52 JP_VDDD.1 | length 49.6
  Top Layer w0.4: CON1.51 CON1.52 0.9,47.9 0.9,18.7 2.916,16.684 JP_VDDD.1
PWR2: CON1.53 CON1.54 JP_VDDA.1 R15.1 | length 45
  Top Layer w0.4: CON1.54 CON1.53 8.895,51.865 JP_VDDA.1@14.765,57.735 ; JP_VDDA.1@14.463,58.037 JP_VDDA.1@14.765,57.735 ; JP_VDDA.1 JP_VDDA.1@14.765,57.735 ; JP_VDDA.1@14.9,57.6 JP_VDDA.1@14.765,57.735 ; v1(30.988,80.772) 31.01,80.75 R15.1
  Bottom Layer w0.2: JP_VDDA.1 30.988,73.958 v1(30.988,80.772)
PWR3: CON1.55 CON1.56 | length 1.9
  Top Layer w0.4: CON1.56 CON1.55
SCL: CON1.98
SDA: CON1.97
VCCA: C18.1 C19.1 CON1.1 CON1.2 CON1.95 CON1.96 CON1.99 CON1.100 R1.1 R3.1 R10.1 T1.1 U1.5 U1.6 U1.7 U1.8 | length 159.4
  Top Layer w0.2: T1.1 33.468,84.86 36.928,81.4 41.37,81.4 41.852,80.918 41.902,80.918 42.252,80.568 R3.1 R10.1 56.554,82.096 R1.1
  Top Layer w0.25: U1.5 49.25,75.475 v1@49.325,75.4 ; U1.6 49.75,75.45 v1@49.8,75.4 ; v1@50.2,75.4 50.25,75.45 U1.7 ; U1.8 50.75,75.45 50.8,75.4
  Top Layer w0.3: CON1.96 CON1.95 CON1.99 CON1.100
  Top Layer w0.6: CON1.2 CON1.1 ; C18.1 49.325,75.4 v1(49.562,75.4) 49.8,75.4 50.2,75.4 v1(50.5,75.4) 50.8,75.4 C19.1 ; R1.1 v1(57.3,82.1)
  Bottom Layer w0.6: CON1.99 11,86.575 11,94.8 15,98.8 63.9,98.8 64.9,97.8 64.9,82.1 ; v1(49.562,75.4) v1(50.5,75.4) 51.5,75.4 52.5,74.4 57.2,74.4 64.9,82.1 ; v1(57.3,82.1) 64.9,82.1
VDD_IO: C12.1 C13.1 L1.2 U2.7 U2.24 | length 44.7
  Top Layer w0.15: U2.24 48.7,50.3 48.9,50.1 48.9,49.4 49.4,48.9 50.7,48.9 50.9,48.7 U2.7 50.9,46.4 50.927,46.373
  Top Layer w0.3: C13.1 22.515,28.556 L1.2 35.544,28.644 50.704,43.804 50.704,44.104 50.927,44.327 50.927,46.373
VDDA: C20.1 C21.1 L3.2 SEL_VREF_P.1 U2.23 | length 63.5
  Top Layer w0.15: 45.312,51.5 46.212,50.6 U2.23
  Top Layer w0.3: C21.1 22.573,56.441 L3.2 ; L3.2@22.923,58.139 22.873,58.139 22.573,57.839 L3.2 ; v1(44.958,52.832) C20.1 ; 45.312,51.5 44.03,52.782 C20.1 ; L3.2 39.123,57.789 44.03,52.882 C20.1
  Bottom Layer w0.3: v1(44.958,52.832) 55.558,52.832 SEL_VREF_P.1
VDDD: C15.1 C16.1 L2.2 U2.13 | length 75.9
  Top Layer w0.15: U2.13 54.3,50.6 54.8,51.1
  Top Layer w0.3: C16.1 22.602,15.298 L2.2 ; L2.2@22.702,16.646 37.746,16.646 64.4,43.3 64.4,50.126 ccw(c64.1,50.126) 64.313,50.337 62.987,51.663 ccw(c62.776,51.45) 62.776,51.75 57.114,51.75 cw(c57.114,52.05) 56.903,51.837 C15.1@55.958,52.782 ; 54.8,51.1 55.3,51.6 55.3,52.124 C15.1@55.958,52.782 ; C15.1 C15.1@55.958,52.782
VEXT_N: P1.2 P2.2 SEL_VIN_N.5 VEXT_N.1 | length 47.7
  Bottom Layer w0.3: VEXT_N.1 39.163,93.811 39.163,87.931 P1.2 P2.2 43.434,78.158 37.846,72.57 37.846,70.612 39.116,69.342 53.34,69.342 SEL_VIN_N.5
VEXT_P: P3.2 P4.2 SEL_VIN_P.5 VEXT_P.1 | length 34.4
  Bottom Layer w0.3: SEL_VIN_P.5 39.624,72.624 54.654,87.654 55.142,87.654 P4.2 P3.2 59.72,87.914 59.72,93.828 VEXT_P.1
VIN_N: SEL_VIN_N.2 SEL_VIN_N.4 SEL_VIN_N.6 U2.19 VIN.2 | length 23.3
  Top Layer w0.15: U2.19 49.7,54.864
  Top Layer w0.3: 49.7,54.864 49.7,62.4 VIN.2
  Top Layer w0.6: VIN.2 51.226,63.926 51.226,64.688 SEL_VIN_N.6 SEL_VIN_N.4 SEL_VIN_N.2
VIN_P: SEL_VIN_P.2 SEL_VIN_P.4 SEL_VIN_P.6 U2.20 VIN.1 | length 23.2
  Top Layer w0.15: 48.768,54.864 49.4,54.232 U2.20
  Top Layer w0.3: VIN.1 48.768,63.5 48.768,54.864
  Top Layer w0.6: SEL_VIN_P.6 SEL_VIN_P.4 SEL_VIN_P.2 48.064,64.712 48.064,64.204 VIN.1
VREF_N: C5.2 C9.1 C10.1 SEL_VREF_N.2 U2.17 VREF.2 | length 41
  Top Layer w0.15: U2.17 50.3,53.373 51.191,54.264
  Top Layer w0.3: 51.191,54.264 52.956,54.264 53.406,54.714 53.782,54.714 54.082,55.014 C5.2 54.082,56.412 C9.1 C10.1 69.708,56.5 VREF.2 78.588,63.754 SEL_VREF_N.2
VREF_P: C5.1 C7.1 C8.1 SEL_VREF_P.2 U2.18 VREF.1 | length 40.2
  Top Layer w0.15: U2.18 50,53.886 51.178,55.064
  Top Layer w0.3: C7.1@50.967,56.5 C8.1 ; 51.178,55.064 C5.1 ; C5.1@52.4,54.788 52.4,56.43 52.409,56.439 C8.1@52.4,56.439 ; C8.1@52.459,56.439 53.47,57.45 68.118,57.45 VREF.1@73.863,63.195 ; SEL_VREF_P.2 72.4,63.754 VREF.1
VSRC0: CON1.71 SEL_VIN_P.3 | length 40.6
  Top Layer w0.2: CON1.71 25.703,63.295 34.07,71.662 41.114,71.662 SEL_VIN_P.3
VSRC1: CON1.72 SEL_VIN_N.3 | length 58.5
  Top Layer w0.2: CON1.72 4.66,62.23 5.869,62.23 6.35,61.749 6.35,61.722 7.112,60.96 24.638,60.96 32.8,69.122 45.139,69.122 45.149,69.112 50.399,69.112 50.409,69.122 55.66,69.122 SEL_VIN_N.3
VSRC2: CON1.73 SEL_VREF_P.3 | length 66.8
  Top Layer w0.2: CON1.73@7.422,64.565 25.703,64.565 33.528,72.39 42.418,72.39 43.434,71.374 43.434,69.85 43.722,69.562 48.705,69.562 48.715,69.572 51.792,69.572 54.102,71.882 57.658,71.882 58.42,71.12 58.42,69.958 59.036,69.342 64.272,69.342 SEL_VREF_P.3
VSRC3: CON1.74 SEL_VCM.3 SEL_VREF_N.3 | length 96.7
  Top Layer w0.2: CON1.74 5.383,64.565 6.604,65.786 10.287,65.786 22.225,77.724 25.654,77.724 SEL_VCM.3 26.924,84.328 29.281,86.685 61.577,86.685 SEL_VREF_N.3@80.274,67.988
pads on no net: CON1.L1 CON1.L2 U1.1

## Polygon pours and split planes (outlines as drawn)
GND on Bottom Layer "NONET_L-01_P-001" (solid, remove dead copper, pour order 0): 0.25,99.75 99.75,99.75 99.75,0.25 0.25,0.25

## Other copper
Top Layer:
  text "1" at 76.708,84.836 h15

## Silkscreen, mask and mechanical layers (free items; w line width, h text height)
Top Overlay:
  circle w0.2: c47.425,46.675 r0.141
  rectangle: 64.729,1.285 92,7
  lines w0.2: 38.354,66.802 38.354,61.468 45.974,61.468 45.974,66.802 ; 53.34,66.802 53.34,61.468 60.96,61.468 60.96,66.802 ; 64.36,66.714 64.36,61.38 71.98,61.38 71.98,66.714 ; 79.008,66.714 79.008,61.38 86.628,61.38 86.628,66.714
  text "VEXT" at 25.064,71.12 h1.5 r90
  text "VSRC3" at 27.621,70.104 h1.5 r90
  text "VDDA/2" at 30.161,69.596 h1.5 r90
  text "GND" at 84.771,63.246 h1.5 r90
  text "VEXT" at 40.32,62.738 h1.5 r90
  text "VEXT" at 55.306,62.738 h1.5 r90
  text "VDDA" at 70.038,62.484 h1.5 r90
  text "VSRC1" at 57.846,61.976 h1.5 r90
  text "VSRC0" at 42.86,61.722 h1.5 r90
  text "VSRC2" at 67.752,61.722 h1.5 r90
  text "VSRC3" at 82.231,61.722 h1.5 r90
  text "OPAMP" at 45.4,61.468 h1.5 r90
  text "OPAMP" at 60.64,61.468 h1.5 r90
  text "CoRDIA ADC01  /  / Test Board V1.0 /  / HK 10/2021" at 65,9.033 h2
Top Solder:
  text "1" at 76.708,84.836 h15
Mechanical 1:
  lines w0.15: 0,1 0,0 ; 0,0 0,100 100,100 100,0 0,0
Board:
  lines w0.15: 0,0 100,0 100,100 0,100 ; 0,0 0,100 ; 0,0 0,100

## Text inside footprints (layer, text, board x,y; h text height)
CON1: Top Overlay "plug" at 0.805,53.845 h3 r270
Designator18: Top Solder "3" at 82,10 h9.13